# Altium PCB Telemeetria_PCB.PcbDoc
Units mil, origin at the board's own origin, x right, y up, seen from the top; angles counter-clockwise.
Board outline 6000 x 4000 mil, 2 copper layers (Top Layer, Bottom Layer); 68 components, 54 nets, 255 pads, 8 vias.
Unrouted connection lines stored in the file: 133.
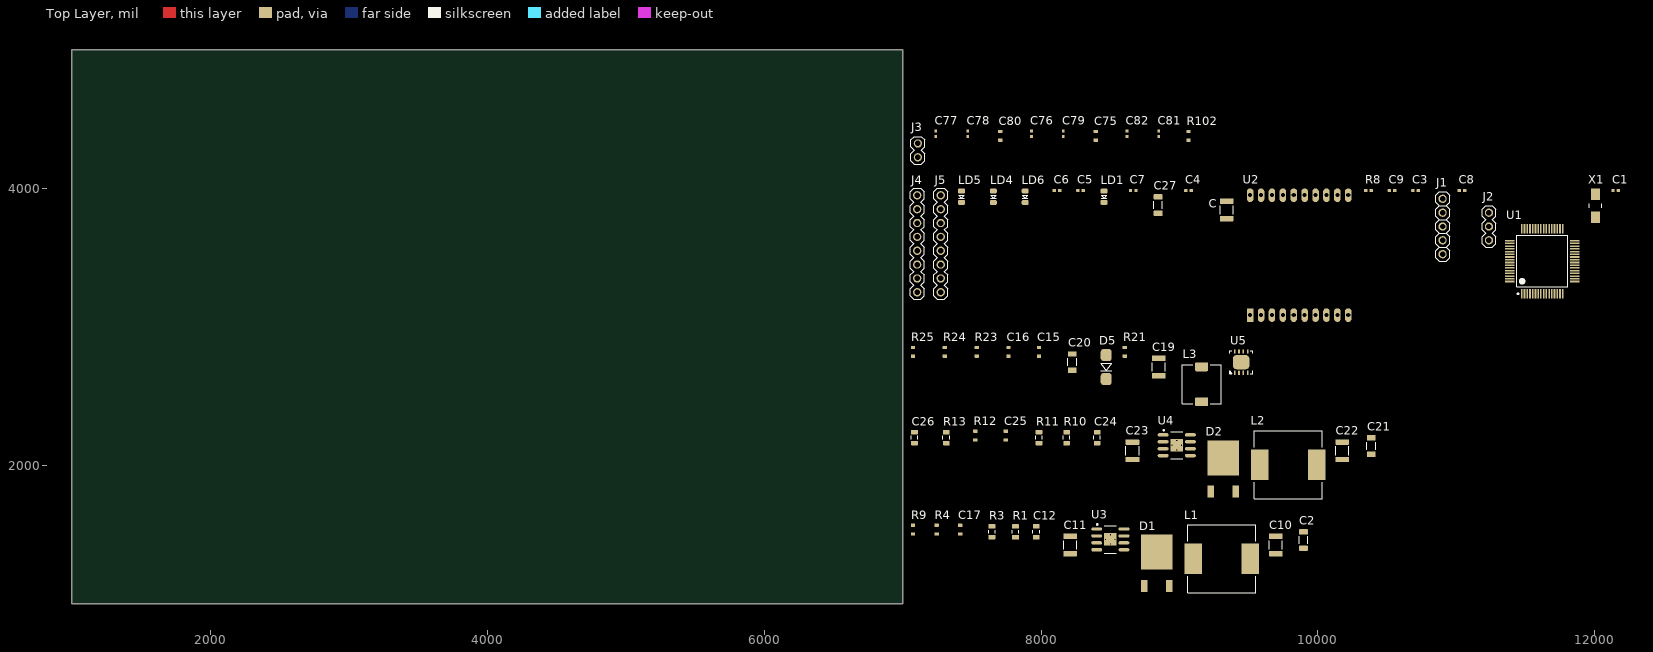
[diagram p0: Top Layer view]
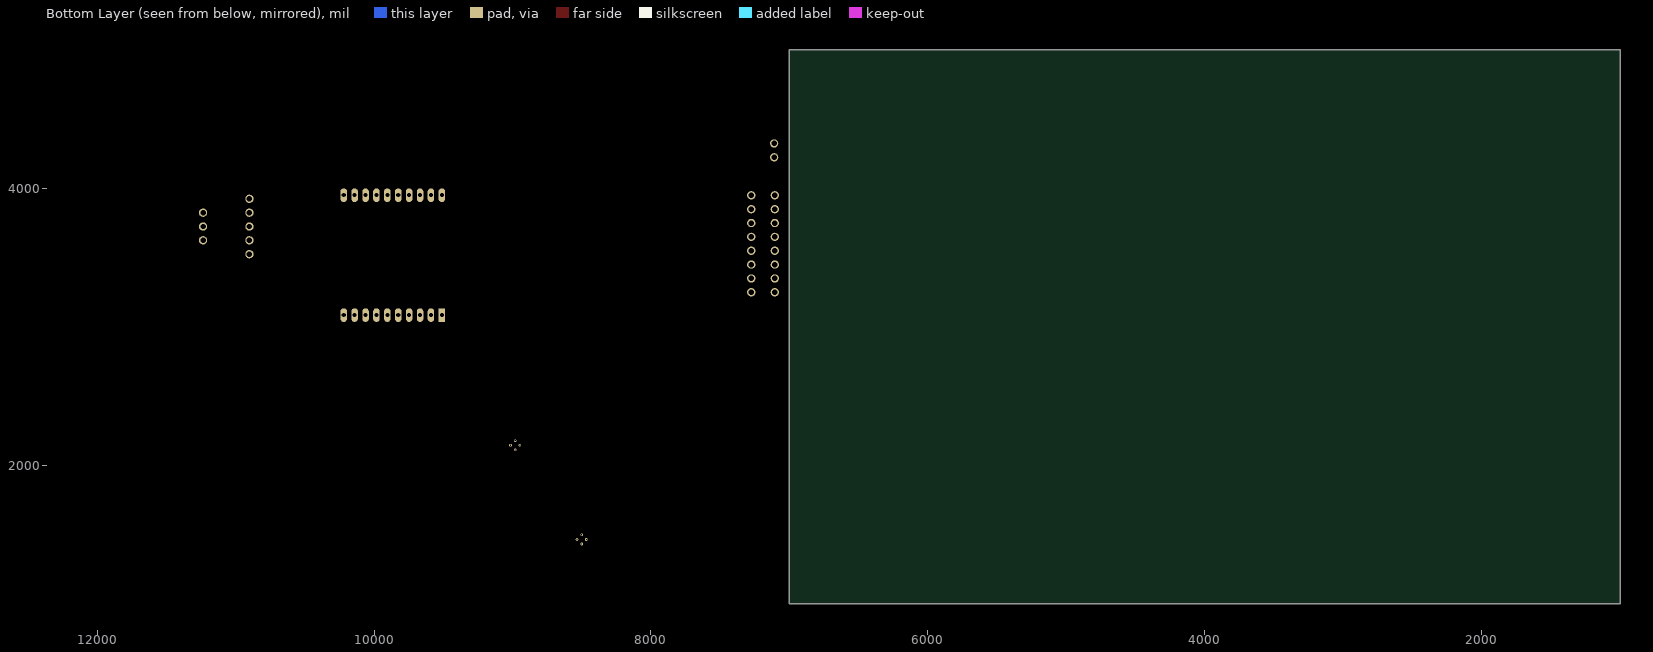
[diagram p1: Bottom Layer view, seen from below]

## Layer stack, top to bottom
Top Solder: solder mask 0.4, Solder Resist, Dk 3.5
Top Layer: signal copper 1.4
Dielectric 1: dielectric 12.6, FR-4, Dk 4.8
Bottom Layer: signal copper 1.4
Bottom Solder: solder mask 0.4, Solder Resist, Dk 3.5

## Board outline
1000,1000 7000,1000 7000,5000 1000,5000

## Design rules (kind name [scope] priority, off if disabled: settings)
Clearance [All] p1: gap=10
PolygonConnect [All] p1: connectstyle=Relief reliefconductorwidth=10 reliefentries=4 polygonreliefangle="90 Angle" airgapwidth=10
RoomDefinition Isoleeritud_can [InComponentClass('Isoleeritud_can')] p1: confinementstyle=ConfineIn formatcopy=TRUE lockcomponents=FALSE outline 7045,4160 9280,4160 9280,4535 7045,4535
RoomDefinition Elektriskeem [InComponentClass('Elektriskeem')] p2: confinementstyle=ConfineIn formatcopy=TRUE lockcomponents=FALSE outline 7045,3025 12240,3025 12240,4110 7045,4110
RoomDefinition 24V_to_5V_regulator [InComponentClass('24V_to_5V_regulator')] p3: confinementstyle=ConfineIn formatcopy=TRUE lockcomponents=FALSE outline 7045,2420 9540,2420 9540,2975 7045,2975
RoomDefinition 24V_to_5V_GSM_regulator [InComponentClass('24V_to_5V_GSM_regulator')] p4: confinementstyle=ConfineIn formatcopy=TRUE lockcomponents=FALSE outline 7045,1740 10510,1740 10510,2370 7045,2370
RoomDefinition 24V_to_3V3_regulator [InComponentClass('24V_to_3V3_regulator')] p5: confinementstyle=ConfineIn formatcopy=TRUE lockcomponents=FALSE outline 7045,1060 9980,1060 9980,1690 7045,1690
RoutingVias [All] p1: holewidth=28 width=50 viastyle="Through Hole" minholewidth=28 minwidth=50 maxholewidth=28 maxwidth=50
SolderMaskExpansion [All] p1: expansion=4
Width [All] p1: maxlimit=10 minlimit=10 preferedwidth=10
30 further rules are at their usual default settings.

## Classes and differential pairs
component class Isoleeritud_can: C75 C76 C77 C78 C79 C80 C81 C82 J3 R87 R102 U6
component class Elektriskeem: C C1 C3 C4 C5 C6 C7 C8 C9 C13 C14 C27 J1 J2 J4 J5 LD1 LD4 LD5 LD6 R2 R5 R6 R7 R8 U1 U2 X1
component class 24V_to_5V_regulator: C15 C16 C19 C20 D5 L3 R20 R21 R23 R24 R25 U5
component class 24V_to_5V_GSM_regulator: C21 C22 C23 C24 C25 C26 D2 L2 R10 R11 R12 R13 U4
component class 24V_to_3V3_regulator: C2 C10 C11 C12 C17 C18 D1 L1 R1 R3 R4 R9 U3

## Components (designator, comment, footprint, x,y, rotation, side; value= is the part's Value field where it differs from the comment)
C "1uF, 50V, 1210" "3225 [1210] CAP" 9340,3845 r90 top
C1 "100nF, 50V, 0402" "1005 [0402] CAP" 12150,3985 r0 top
C2 "220nF, 50V, 1206" "3216 [1206] CAP" 9895,1460 r90 top
C3 "100nF, 50V, 0402" "1005 [0402] CAP" 10705,3985 r0 top
C4 "100nF, 50V, 0402" "1005 [0402] CAP" 9065,3985 r0 top
C5 "100nF, 50V, 0402" "1005 [0402] CAP" 8285,3985 r0 top
C6 "2.2uF, 50V, 0402" "1005 [0402] CAP" 8115,3985 r0 top
C7 "100nF, 50V, 0402" "1005 [0402] CAP" 8665,3985 r0 top
C8 "100nF, 50V, 0402" "1005 [0402] CAP" 11040,3985 r0 top
C9 "2.2uF, 50V, 0402" "1005 [0402] CAP" 10535,3985 r0 top
C10 "4.7uF, 50V, 1210" "3225 [1210] CAP" 9695,1425 r90 top
C11 "68uF, 6.3V, 1210" "3225 [1210] CAP" 8210,1425 r90 top
C12 "12nF, 50V, 0805" "2012 [0805] CAP" 7965,1520 r90 top
C15 "100nF, 50V, 0603" "1608 [0603] CAP" 7985,2820 r90 top
C16 "1uF, 50V, 0603" "1608 [0603] CAP" 7765,2820 r90 top
C17 "1.2nF, 0603" "1608 [0603] CAP" 7415,1535 r90 top
C19 "22uF, 25V, 1210" "3225 [1210] CAP" 8850,2710 r90 top
C20 "6.8uF, 100V, 1206" "3216 [1206] CAP" 8225,2745 r90 top
C21 "220nF, 50V, 1206" "3216 [1206] CAP" 10385,2140 r90 top
C22 "4.7uF, 50V, 1210" "3225 [1210] CAP" 10175,2105 r90 top
C23 "68uF, 6.3V, 1210" "3225 [1210] CAP" 8660,2105 r90 top
C24 "12nF, 50V, 0805" "2012 [0805] CAP" 8405,2200 r90 top
C25 "1.2nF, 0603" "1608 [0603] CAP" 7745,2215 r90 top
C26 "56nF, 50V, 0805" "2012 [0805] CAP" 7085,2200 r90 top
C27 "68pF, 50V, 1206" "3216 [1206] CAP" 8845,3880 r90 top
C75 "10uF, 0603" "1608 [0603] CAP" 8395,4380 r90 top
C76 "100nF, 0402" "1005 [0402] CAP" 7930,4395 r90 top
C77 "10nF, 0402" "1005 [0402] CAP" 7240,4395 r90 top
C78 "100nF, 0402" "1005 [0402] CAP" 7470,4395 r90 top
C79 "100nF, 0402" "1005 [0402] CAP" 8160,4395 r90 top
C80 "10uF, 0603" "1608 [0603] CAP" 7705,4380 r90 top
C81 "100nF, 0402" "1005 [0402] CAP" 8850,4395 r90 top
C82 "10nF, 0402" "1005 [0402] CAP" 8620,4395 r90 top
D1 "45Vbr, 10A, 0.50Vf" "DPAK (TO252-3)" 8835,1130 r0 top
D2 "45Vbr, 10A, 0.50Vf" "DPAK (TO252-3)" 9315,1810 r0 top
D5 "200Vbr, 1A, 0.92Vf" "DO214AC (SMA)" 8470,2710 r90 top
J1 "Pin Header 5x1" "Pin Header 5x1" 10900,3525 r90 top
J2 "Pin Header 3x1" "Pin Header 3x1" 11235,3625 r90 top
J3 "2.54mm" "Pin Header 2x1" 7110,4225 r90 top
J4 "Pin Header 8x1" "Pin header 8x1 2.54mm vertical" 7105,3250 r90 top
J5 "Pin Header 8x1" "Pin header 8x1 2.54mm vertical" 7275,3250 r90 top
L1 "15uH, 5.2A" "12.5 x 12.5 x 8.5 (mm)" 9305,1325 r0 top
L2 "18uH, 5.2A" "12.5 x 12.5 x 8.5 (mm)" 9785,2005 r0 top
L3 "220uH, 400mA" "Bourns SRR0735" 9160,2585 r90 top
LD1 "0805, green, 50mcd" LED2012X06N 8455,3940 r90 top
LD4 "0805, green, 50mcd" LED2012X06N 7655,3940 r90 top
LD5 "0805, green, 50mcd" LED2012X06N 7425,3940 r90 top
LD6 "0805, green, 50mcd" LED2012X06N 7885,3940 r90 top
R1 "110R" "2012 [0805] RES" 7815,1520 r90 top
R3 "4.7k, 0805" "2012 [0805] RES" 7645,1520 r90 top
R4 "1k, 0603" "1608 [0603] RES" 7245,1535 r90 top
R8 "10K  0402" "1005 [0402] RES" 10365,3985 r0 top
R9 "1.05k, 0603" "1608 [0603] RES" 7075,1535 r90 top
R10 "110R" "2012 [0805] RES" 8185,2200 r90 top
R11 "4.7k, 0805" "2012 [0805] RES" 7985,2200 r90 top
R12 "1k, 0603" "1608 [0603] RES" 7525,2215 r90 top
R13 "787R, 0805" "2012 [0805] RES" 7315,2200 r90 top
R21 "280k, 0603" "1608 [0603] RES" 8605,2820 r90 top
R23 "698k, 0603" "1608 [0603] RES" 7535,2820 r90 top
R24 "5k, 0603" "1608 [0603] RES" 7305,2820 r90 top
R25 "5k, 0603" "1608 [0603] RES" 7075,2820 r90 top
R102 "?R, ?mW, 0805" "1608 [0603] RES" 9065,4380 r90 top
U1 "STM32F4 64-pin" LQFP64 11620,3475 r90 top
U2 "Xbee" "XBEE - duplicate1" 9510,3085 r90 top
U3 "L7981ATR" HSOP8-D1_N 8500,1465 r0 top
U4 "L7981ATR" HSOP8-D1_N 8980,2145 r0 top
U5 "LM5008ASD/NOPB" WSON8 9445,2745 r90 top
X1 "8 MHz" "5.0x3.2 SMD Crystal" 12005,3875 r90 top

## Footprints (in the part's own frame and the unit in brackets; to place one, negate y for a bottom-side part, rotate by r counter-clockwise, add the part's x,y. Pads: shape width x height; smd on the part's side, far side on the other; paste and mask are expansions set on the pad)
"5.0x3.2 SMD Crystal" [mm]
  rect 2.15x1.7 smd: 1(-2.125,0) 2(2.125,0)
  silkscreen extent -0.4,-1.15 0.4,1.15, body extent -2.5,-1.6 2.5,1.6, height 1.3
"12.5 x 12.5 x 8.5 (mm)" [mm] "Precision Wire Wound Inductor, 2-Leads, Body 12,50x12,50mm, IPC Medium Density"
  rect 3.25x5.6 smd: 1(-5.25,0) 2(5.25,0)
  silkscreen extent -6.25,-6.25 6.25,6.25, body extent -6.35,-6.25 6.35,6.25, height 8.6
"1005 [0402] CAP" [mm]
  rrect25% 0.6x0.5 smd mask+0.05: 1(-0.5,0) 2(0.5,0)
  body extent -0.5,-0.25 0.5,0.25, height 0.49
"1005 [0402] RES" [mm] "Chip Resistor, 2-Leads, Body 1.00x0.50mm, IPC High Density"
  rrect25% 0.6x0.5 smd mask+0.05: 1(-0.5,0) 2(0.5,0)
  body extent -0.5,-0.25 0.5,0.25, height 0.35
"1608 [0603] CAP" [mm]
  rrect25% 0.6x0.8 smd mask+0.05: 1(-0.8,0) 2(0.8,0)
  body extent -0.93,-0.41 0.93,0.41, height 0.81
"1608 [0603] RES" [mm]
  rrect25% 0.6x0.8 smd mask+0.05: 1(-0.8,0) 2(0.8,0)
  body extent -0.8,-0.4 0.8,0.4, height 0.46
"2012 [0805] CAP" [mm]
  rrect25% 0.8x1.25 smd mask+0.05: 1(-1,0) 2(1,0)
  silkscreen extent -0.3,-0.6 0.3,0.6, body extent -1.09,-0.64 1.09,0.64, height 1.26
"2012 [0805] RES" [mm]
  rrect25% 0.8x1.25 smd mask+0.05: 1(-1,0) 2(1,0)
  silkscreen extent -0.3,-0.6 0.3,0.6, body extent -1,-0.62 1,0.63, height 0.6
"3216 [1206] CAP" [mm]
  rrect25% 1x1.6 smd mask+0.05: 1(-1.5,0) 2(1.5,0)
  silkscreen extent -0.7,-0.8 0.7,0.8, body extent -1.75,-0.81 1.75,0.81, height 1.61
"3225 [1210] CAP" [mm]
  rrect25% 1x2.5 smd mask+0.05: 1(-1.6,0) 2(1.6,0)
  silkscreen extent -0.8,-1.2 0.8,1.2, body extent -1.6,-1.25 1.6,1.25, height 0.79
"Bourns SRR0735" [mm] "7.3x7.3x3.5mm shielded smd inductor"
  rrect25% 1.6x2.4 smd mask+0.05: 1(-3.2,0) 2(3.2,0)
  silkscreen extent -3.6,-3.6 3.6,3.6, body extent -3.7,-3.7 3.7,3.7, height 3.5
"DO214AC (SMA)" [mm]
  rrect50% 2.2x2 smd mask+0.05: 1(-2.2,0) 2(2.2,0)
  silkscreen extent -0.7,-1 0.7,1, body extent -2.75,-1.4 2.75,1.4, height 2.6
"DPAK (TO252-3)" [mm]
  rect 1.2x2.2 smd mask+0.05: 1(-2.3,0) 3(2.3,0)
  rect 5.8x6.4 smd mask+0.05: 2(0,6.2)
  body extent -3.29,-0.7 3.29,9, height 2.3
HSOP8-D1_N [mm] "SOIC, 8-Leads, Body 4.9x3.9mm, Pitch 1.27mm, Thermal Pad, IPC Medium Density"
  oval 2x0.6 smd: 1(-2.5,1.905) 2(-2.5,0.635) 3(-2.5,-0.635) 4(-2.5,-1.905) 5(2.5,-1.905) 6(2.5,-0.635) 7(2.5,0.635) 8(2.5,1.905)
  rect 2.3x2.3 smd paste-1.15: 9(0,0)
  silkscreen extent -2.52,-2.5 1.1,2.88, body extent -2,-2.5 2,2.5, height 1.7
LED2012X06N [mm] "0805 Led, 2-Leads, Body 2,00x1,25mm, IPC Medium Density"
  rrect50% 0.85x1.3 smd mask+0.05: 1(-1.05,0) 2(1.05,0)
  silkscreen extent -0.3,-0.5 0.3,0.5, body extent -1.04,-0.63 1.02,0.63, height 0.85
LQFP64 [mm]
  rect 1.75x0.3 smd mask+0.05: 1(-5.975,3.75) 2(-5.975,3.25) 3(-5.975,2.75) 4(-5.975,2.25) 5(-5.975,1.75) 6(-5.975,1.25) 7(-5.975,0.75) 8(-5.975,0.25) 9(-5.975,-0.25) 10(-5.975,-0.75) 11(-5.975,-1.25) 12(-5.975,-1.75) 13(-5.975,-2.25) 14(-5.975,-2.75) 15(-5.975,-3.25) 16(-5.975,-3.75) 33(5.975,-3.75) 34(5.975,-3.25) 35(5.975,-2.75) 36(5.975,-2.25) 37(5.975,-1.75) 38(5.975,-1.25) 39(5.975,-0.75) 40(5.975,-0.25) 41(5.975,0.25) 42(5.975,0.75) 43(5.975,1.25) 44(5.975,1.75) 45(5.975,2.25) 46(5.975,2.75) 47(5.975,3.25) 48(5.975,3.75)
  rect 0.3x1.75 smd mask+0.05: 17(-3.75,-5.975) 18(-3.25,-5.975) 19(-2.75,-5.975) 20(-2.25,-5.975) 21(-1.75,-5.975) 22(-1.25,-5.975) 23(-0.75,-5.975) 24(-0.25,-5.975) 25(0.25,-5.975) 26(0.75,-5.975) 27(1.25,-5.975) 28(1.75,-5.975) 29(2.25,-5.975) 30(2.75,-5.975) 31(3.25,-5.975) 32(3.75,-5.975) 49(3.75,5.975) 50(3.25,5.975) 51(2.75,5.975) 52(2.25,5.975) 53(1.75,5.975) 54(1.25,5.975) 55(0.75,5.975) 56(0.25,5.975) 57(-0.25,5.975) 58(-0.75,5.975) 59(-1.25,5.975) 60(-1.75,5.975) 61(-2.25,5.975) 62(-2.75,5.975) 63(-3.25,5.975) 64(-3.75,5.975)
  silkscreen extent -6.1,-4.7 4.7,4.7, body extent -6,-6 6,6, height 1.5
"Pin Header 2x1" [mil]
  round 60 hole 39.37 mask+1.97: 1(0,0) 2(100,0)
  silkscreen extent -50,-50 150,50, body extent -50,-49 150,49, height 336
"Pin Header 3x1" [mil]
  round 60 hole 39.37 mask+1.97: 1(0,0) 2(100,0) 3(200,0)
  silkscreen extent -50,-50 250,50, body extent -50,-49 250,49, height 336
"Pin Header 5x1" [mil]
  round 60 hole 39.37 mask+1.97: 1(0,0) 2(100,0) 3(200,0) 4(300,0) 5(400,0)
  silkscreen extent -50,-50 450,50, body extent -50,-49 450,49, height 336
"Pin header 8x1 2.54mm vertical" [mil]
  round 60 hole 39.37 mask+1.97: 1(0,0) 2(100,0) 3(200,0) 4(300,0) 5(400,0) 6(500,0) 7(600,0) 8(700,0)
  silkscreen extent -50,-50 750,50, body extent -50,-49 750,49, height 336
WSON8 [mm] "SON, 8-Leads, Body 4.00x4.00mm, Pitch 0.80mm, Thermal Pad 3.00x2.60mm, IPC Medium Density"
  rrect50% 0.8x0.3 smd mask+0.05: 1(-1.96,1.2) 2(-1.96,0.4) 3(-1.96,-0.4) 4(-1.96,-1.2) 5(1.96,-1.2) 6(1.96,-0.4) 7(1.96,0.4) 8(1.96,1.2)
  rrect50% 2.6x3 smd paste-1.3 mask+0.05: 9(0,0)
  silkscreen extent -2.1,-2.1 2.1,2.1, body extent -2,-2 2,2, height 0.8
"XBEE - duplicate1" [mm]
  rect 2.5x1.2 hole 0.75: 1(0,0)
  oval 2.5x1.2 hole 0.75: 2(0,-2) 3(0,-4) 4(0,-6) 5(0,-8) 6(0,-10) 7(0,-12) 8(0,-14) 9(0,-16) 10(0,-18) 11(22,-18) 12(22,-16) 13(22,-14) 14(22,-12) 15(22,-10) 16(22,-8) 17(22,-6) 18(22,-4) 19(22,-2) 20(22,0)
  body extent -1,-19.48 23,1.5, height 4.5

## Part data
C C1 C2 C3 C4 C5 C6 C7 C8 C9 C10 C11 C12 C15 C16 C17 C19 C20 C21 C22 C23 C24 C25 C26 C27 C75 C76 C77 C78 C79 C80 C81 C82: library part Capacitor
D1 D2 D5: library part "Diode Shottky"
J3: library part "Pin Header 2x1"
L1 L2 L3: library part Inductor
LD1 LD4 LD5 LD6: library part LED, "Cathode (-) marked by silkscreen line"
R1 R3 R4 R8 R9 R10 R11 R12 R13 R21 R23 R24 R25 R102: library part Resistor
U3 U4: "3 A step-down switching regulator, 8-Pin HSOP, Tape and Reel"
U5: library part LM5008
X1: library part Crystal

## Via types
v1: diameter 19.68, hole 7.87, Top Layer to Bottom Layer, 8 vias

## Nets (pads, with @x,y where several pads share a name; then routed paths per layer and width w, separated by ;. In a path a pad name is that pad's centre, name@x,y a point inside that pad or via, vN(x,y) a via of type N, cw(c..) or ccw(c..) an arc to the next point about the centre after c; other vN are vias at no path point)
3V3: C1.2 C3.1 C4.2 C5.1 C7.2 C8.2 C11.1 C12.1 C23.1 C24.1 C27.1 C77.1 C78.1 C.1 J1.1 L1.2 L2.2 R3.2 R11.2 U1.1 U1.13 U1.19 U1.32 U1.48 U1.64 U2.1
5V: C75.1 C76.1
5VDC: C19.1 L3.1 R24.2
5VON: U1.41
24V: C2.2 C10.1 C21.2 C22.1 J4.1 U3.3 U3.8 U4.3 U4.8
350SW: C15.2 D5.1 L3.2 U5.1
350VCC: C16.2 U5.7
BOOT0: R8.1 U1.60
CAN1_H: J5.1
CAN1_L: J3.1 J5.2
CAN_GND: C79.2 C80.2 C81.2 C82.2 R102.2
CAN_RX: U1.33
CAN_TX: U1.34
DIN: J2.2 U1.42 U2.3
DOUT: J2.1 U1.43 U2.2
GND: C1.1 C2.1 C3.2 C4.1 C5.2 C6.2 C7.1 C8.1 C9.1 C10.2 C11.2 C16.1 C19.2 C20.2 C21.1 C22.2 C23.2 C27.2 C75.2 C76.2 C77.2 C78.2 C.2 D1.3 D2.3 D5.2 J1.3 J2.3 J4.2 LD1.1 LD4.1 LD5.1 LD6.1 R8.2 R9.1 R13.1 R23.1 R25.1 U1.12 U1.18 U1.63 U2.10 U3.7 U4.7 U5.4 U5.9
LED1: U1.22
LED2: U1.23
LED3: U1.24
LED4: U1.25
LED5: U1.26
NetC6_1: C6.1 U1.31
NetC9_2: C9.2 U1.47
NetC12_2: C12.2 R1.2
NetC15_1: C15.1 U5.2
NetC17_1: C17.1 R1.1 R3.1 R4.2 R9.2 U3.5
NetC17_2: C17.2 U3.4
NetC18_1: R4.1
NetC20_1: C20.1 R21.2 U5.8
NetC24_2: C24.2 R10.2
NetC25_1: C25.1 R10.1 R11.1 R12.2 R13.2 U4.5
NetC25_2: C25.2 C26.2 U4.4
NetC26_1: C26.1 R12.1
NetC79_1: C79.1 C80.1 C81.1 C82.1
NetD1_1: D1.2 L1.1 U3.1
NetD2_1: D2.2 L2.1 U4.1
NetJ3_2: J3.2
NetLD1_2: LD1.2
NetLD4_2: LD4.2
NetLD5_2: LD5.2
NetLD6_2: LD6.2
NetR21_1: R21.1 U5.6
NetR23_2: R23.2 U5.3
NetR24_1: R24.1 R25.2 U5.5
NetR102_1: R102.1
NRST: J1.5 U1.7
"OSC IN": U1.5 X1.1
"OSC OUT": U1.6 X1.2
RESET: U2.5
SWCLK: J1.2 U1.49
SWDIO: J1.4 U1.46
XBINDI: U2.15
XBSLP: U1.27 U2.9
XBSTAT: U2.13
pads on no net: D1.1 D2.1 J4.3 J4.4 J4.5 J4.6 J4.7 J4.8 J5.3 J5.4 J5.5 J5.6 J5.7 J5.8 U1.2 U1.3 U1.4 U1.8 U1.9 U1.10 U1.11 U1.14 U1.15 U1.16 U1.17 U1.20 U1.21 U1.28 U1.29 U1.30 U1.35 U1.36 U1.37 U1.38 U1.39 U1.40 U1.44 U1.45 U1.50 U1.51 U1.52 U1.53 U1.54 U1.55 U1.56 U1.57 U1.58 U1.59 U1.61 U1.62 U2.4 U2.6 U2.7 U2.8 U2.11 U2.12 U2.14 U2.16 U2.17 U2.18 U2.19 U2.20 U3.2 U3.6 U3.9 U4.2 U4.6 U4.9
copper on no net:
  other v1: 8500,1431.54 8466.54,1465 8533.46,1465 8500,1498.46 8980,2111.54 8946.54,2145 9013.46,2145 8980,2178.46